# EAGLE board SAS_rev04 (EAGLE 7.5.0)
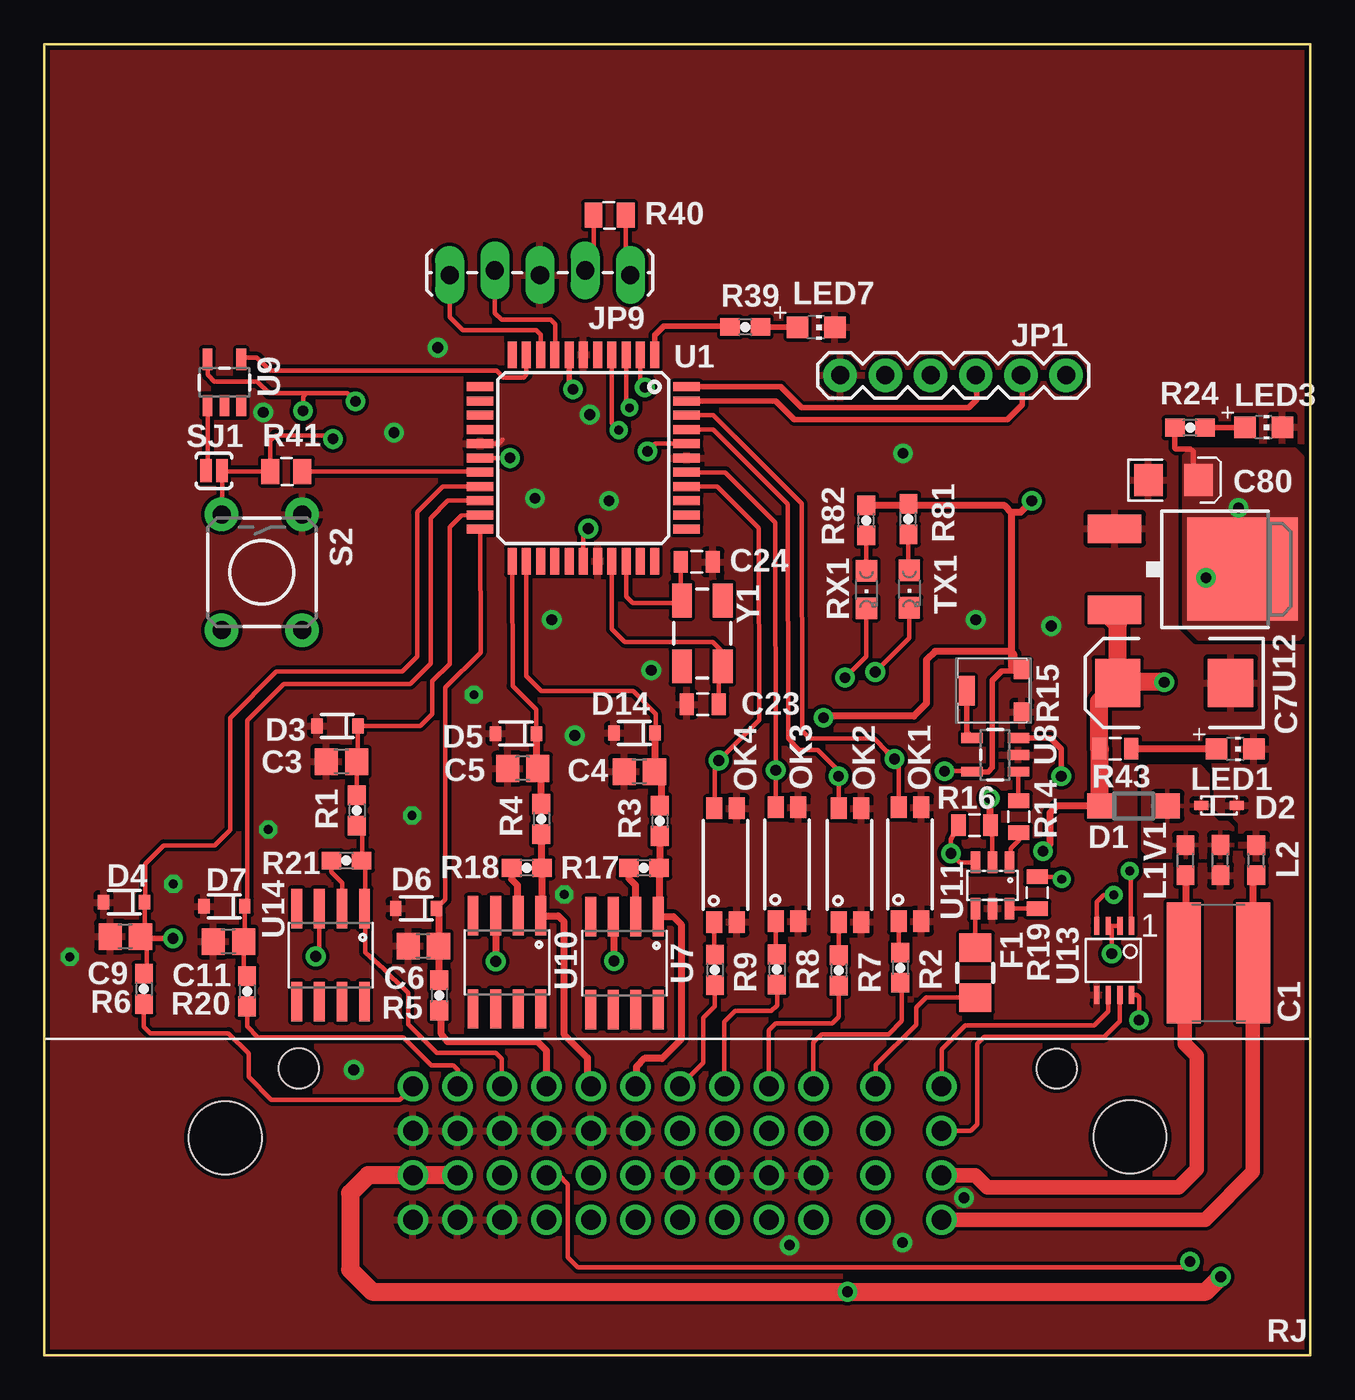
[diagram p0: board, top side]
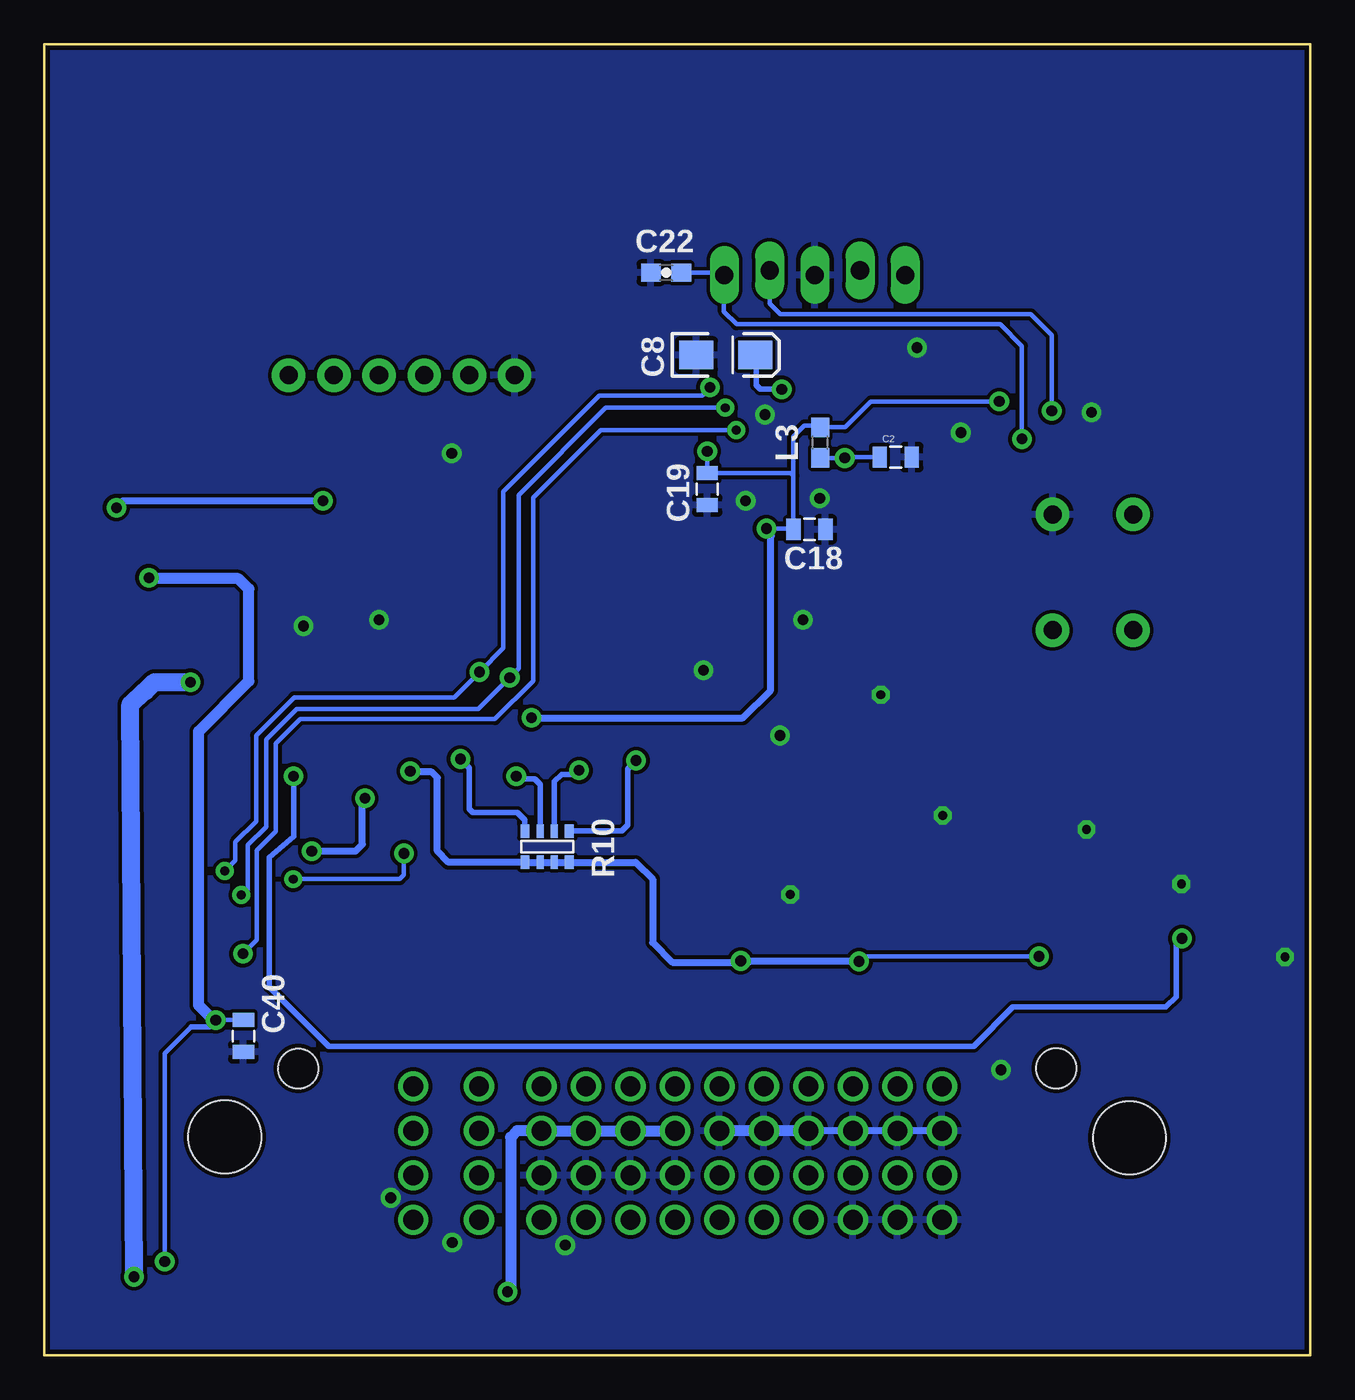
[diagram p1: board, bottom side, seen from below]

Size 71.12 x 73.66 mm. Coordinates in mm from the lower left corner, seen from the top.
Copper layers (1*16): Top 0.035mm / dielectric 1.5mm / Bottom 0.035mm
Design rules "SparkFun *": minimum track width 8mil, minimum drill 19mil, track to track 8mil, track to pad 8mil, pad to pad 8mil, via to via 8mil, smd to smd 8mil, copper to edge 10mil, drill to drill 8mil, minimum pad ring 12mil, minimum via ring 10mil, stop-mask expansion 4mil, vias tented up to drill 25mil, thermal gap 10mil

## Footprints (pad centres in the part's own frame; a part is rotated, then mirrored left to right if it is on the bottom)
C1825 = smd 6.8 x 1.9: 1 0,-1.95; 2 0,1.95
0805 = smd 0.8 x 1.2: 1 -0.9,0; 2 0.9,0
C0805 = smd 1.3 x 1.5: 1 -0.85,0; 2 0.85,0
EIA7343 = smd 2.55 x 2.7: A 3.17,0; C -3.17,0
EIA3216-16V = smd 1.9 x 1.6: A 1.65,0; C -1.65,0
0603 = smd 1.1 x 1: 1 -0.85,0; 2 0.85,0
POLC1206 = smd 1.6 x 1.8: 1 -1.4,0; 2 1.4,0
SOD123 = smd 1.4 x 1.4: A 1.9,0; C -1.9,0
SOD-523F = smd 0.8 x 0.5: A -1,0; C 1,0
SOD-323 = smd 0.63 x 0.83: 1 -1.15,0; 2 1.15,0
1206 = smd 1.6 x 1.8: 1 -1.4,0; 2 1.4,0
36638-M = drill 1.1: 1 20.7,15.1; 2 20.7,12.6; 3 20.7,10.1; 4 20.7,7.6; 5 23.2,15.1; 6 23.2,12.6; 7 23.2,10.1; 8 23.2,7.6; 9 25.7,15.1; 10 25.7,12.6; 11 25.7,10.1; 12 25.7,7.6; 13 28.2,15.1; 14 28.2,12.6; 15 28.2,10.1; 16 28.2,7.6; 17 30.7,15.1; 18 30.7,12.6; 19 30.7,10.1; 20 30.7,7.6; 21 33.2,15.1; 22 33.2,12.6; 23 33.2,10.1; 24 33.2,7.6; 25 35.7,15.1; 26 35.7,12.6; 27 35.7,10.1; 28 35.7,7.6; 29 38.2,15.1; 30 38.2,12.6; 31 38.2,10.1; 32 38.2,7.6; 33 40.7,15.1; 34 40.7,12.6; 35 40.7,10.1; 36 40.7,7.6; 37 43.2,15.1; 38 43.2,12.6; 39 43.2,10.1; 40 43.2,7.6; 41 46.7,15.1; 42 46.7,12.6; 43 46.7,10.1; 44 46.7,7.6; 45 50.4,15.1; 46 50.4,12.6; 47 50.4,10.1; 48 50.4,7.6 | hole 2.25: 56.87,16.1; 14.28,16.12 | hole 4.1: 60.99,12.26; 10.16,12.21
FTDI_BASIC = drill 1.016 pad 1.88: CTS 10.16,0; DTR 0,0; GND 12.7,0; RXI 2.54,0; TXO 5.08,0; VCC 7.62,0
1X05_LOCK_LONGPADS = drill 1.016 long: 1 0,0; 2 2.54,-0.254; 3 5.08,0; 4 7.62,-0.254; 5 10.16,0
CHIP-LED0805 = smd 1.2 x 1.2: A 0,-1.05; C 0,1.05
SOP-4 = smd 1.2 x 0.9: 1 -3.2,0.67; 2 -3.2,-0.6; 3 3.2,-0.6; 4 3.2,0.67
MNR14 = smd 0.5 x 0.75: 1 -1.25,-0.9; 4 1.25,-0.9; 5 1.25,0.85; 8 -1.25,0.85 | smd 0.4 x 0.75: 2 -0.4,-0.9; 3 0.4,-0.9; 6 0.4,0.85; 7 -0.4,0.85
PVG3 = smd 1.1 x 0.9: 1 1.2,-1.5; 3 -1.2,-1.5 | smd 1.65 x 0.9: 2 0,1.6
0805' = smd 1 x 1.4: 1 -0.9,0; 2 0.9,0
CHIPLED_0805 = smd 1.2 x 1.2: A 0,-1.05; C 0,1.05
TACTILE-PTH = drill 1.016 pad 1.88: 1 -3.251,2.261; 2 3.251,2.261; 3 -3.251,-2.261; 4 3.251,-2.261
SJ_2S-NO = smd 0.635 x 1.27: 1 -0.45,0; 2 0.45,0
TQFP-44 = smd 1.5 x 0.5: 1 -5.8,4; 2 -5.8,3.2; 3 -5.8,2.4; 4 -5.8,1.6; 5 -5.8,0.8; 6 -5.8,0; 7 -5.8,-0.8; 8 -5.8,-1.6; 9 -5.8,-2.4; 10 -5.8,-3.2; 11 -5.8,-4; 23 5.8,-4; 24 5.8,-3.2; 25 5.8,-2.4; 26 5.8,-1.6; 27 5.8,-0.8; 28 5.8,0; 29 5.8,0.8; 30 5.8,1.6; 31 5.8,2.4; 32 5.8,3.2; 33 5.8,4 | smd 0.5 x 1.5: 12 -4,-5.8; 13 -3.2,-5.8; 14 -2.4,-5.8; 15 -1.6,-5.8; 16 -0.8,-5.8; 17 0,-5.8; 18 0.8,-5.8; 19 1.6,-5.8; 20 2.4,-5.8; 21 3.2,-5.8; 22 4,-5.8; 34 4,5.8; 35 3.2,5.8; 36 2.4,5.8; 37 1.6,5.8; 38 0.8,5.8; 39 0,5.8; 40 -0.8,5.8; 41 -1.6,5.8; 42 -2.4,5.8; 43 -3.2,5.8; 44 -4,5.8
SO-8 = smd 0.61 x 2.21: 1 -1.905,-2.616; 2 -0.635,-2.616; 3 0.635,-2.616; 4 1.905,-2.616; 5 1.905,2.616; 6 0.635,2.616; 7 -0.635,2.616; 8 -1.905,2.616
SOT23-5 = smd 0.55 x 1.2: 1 -0.95,-1.3; 2 0,-1.3; 3 0.95,-1.3; 4 0.95,1.3; 5 -0.95,1.3
SOT23-5L = smd 0.55 x 1.2: 1 -0.95,-1.3; 2 0,-1.3; 3 0.95,-1.3; 4 0.95,1.3; 5 -0.95,1.3
SOT23-6 = smd 0.55 x 1.2: 1 -0.95,-1.3; 2 0,-1.3; 3 0.95,-1.3; 4 0.95,1.3; 5 0,1.3; 6 -0.95,1.3
V-REG_DPACK = smd 1.6 x 3: 1 -2.28,-4.8; 3 2.28,-4.8 | smd 5.8 x 6.2: 4 0,2.38
MSOP-8 = smd 0.3 x 1: 1 -0.975,-1.95; 2 -0.325,-1.95; 3 0.325,-1.95; 4 0.975,-1.95; 5 0.975,1.925; 6 0.325,1.925; 7 -0.325,1.925; 8 -0.975,1.925
CRYSTAL-SMD-5X3 = smd 1.9 x 1.1: 1 -1.85,-1.15; 2 1.85,-1.15; 3 1.85,1.15; 4 -1.85,1.15

## Placement (x,y rotation side)
C1  CAP_1000PF_2KV  [C1825]  65.96,22.05 270 top
C2  .1uF  [0805]  23.29,50.47 0 bottom
C3  10uF  [C0805]  16.69,33.35 180 top
C4  10uF  [C0805]  33.43,32.79 180 top
C5  10uF  [C0805]  26.87,32.97 180 top
C6  10uF  [C0805]  21.29,22.99 180 top
C7  100uF  [EIA7343]  63.47,37.77 180 top
C8  10uF  [EIA3216-16V]  32.84,56.21 0 bottom
C9  10uF  [C0805]  4.55,23.52 180 top
C11  10uF  [C0805]  10.34,23.24 180 top
C18  0.1uF  [0805]  28.14,46.41 0 bottom
C19  0.1uF  [0805]  33.88,48.67 270 bottom
C22  10n  [0603]  36.2,60.83 180 bottom
C23  12pF  [0805]  36.98,36.58 180 top
C24  12pF  [0805]  36.65,44.58 0 top
C40  .1uF  [0805]  59.94,17.93 270 bottom
C80  10uF  [POLC1206]  63.43,49.18 180 top
D1  1N4001  [SOD123]  61.19,30.86 0 top
D2  MM5Z30  [SOD-523F]  65.99,30.89 180 top
D3  BZX384-B3V3  [SOD-323]  16.46,35.36 180 top
D4  BZX384-B3V3  [SOD-323]  4.47,25.45 180 top
D5  BZX384-B3V3  [SOD-323]  26.49,34.93 180 top
D6  BZX384-B3V3  [SOD-323]  20.88,25.1 180 top
D7  BZX384-B3V3  [SOD-323]  10.11,25.22 180 top
D14  BZX384-B3V3  [SOD-323]  33.15,34.96 180 top
F1  120mA  [1206]  52.3,21.49 270 top
J1  36638NEW  [36638-M]  0,0 0 top
JP1  FTDI_BASICPTH  [FTDI_BASIC]  57.4,55.07 180 top
JP9  ICSP  [1X05_LOCK_LONGPADS]  32.92,60.71 180 top
L1  FB  [0603]  64.11,27.82 90 top
L2  FB  [0603]  68.09,27.81 90 top
L3  FB  [0603]  27.53,51.28 90 bottom
LED1  [CHIP-LED0805]  66.9,34.06 270 top
LED3  [CHIP-LED0805]  68.5,52.15 270 top
LED7  [CHIP-LED0805]  43.36,57.76 270 top
OK1  TCMT1103  [SOP-4]  48.67,27.58 90 top
OK2  TCMT1103  [SOP-4]  45.29,27.53 90 top
OK3  TCMT1103  [SOP-4]  41.76,27.58 90 top
OK4  TCMT1103  [SOP-4]  38.3,27.53 90 top
R1  1k  [0603]  17.55,30.61 270 top
R2  220  [0603]  48.08,21.77 270 top
R3  1k  [0603]  34.57,30.02 270 top
R4  1k  [0603]  27.91,30.12 270 top
R5  1k  [0603]  22.17,20.22 270 top
R6  1k  [0603]  5.59,20.57 270 top
R7  220  [0603]  44.63,21.62 270 top
R8  220  [0603]  41.15,21.67 270 top
R9  220  [0603]  37.67,21.64 270 top
R10  10K  [MNR14]  42.88,28.55 180 bottom
R14  1K  [0805]  54.74,30.25 90 top
R15  10k  [PVG3]  53.42,37.34 90 top
R16  10K  [0805]  52.25,29.77 180 top
R17  68  [0603]  33.68,27.38 180 top
R18  68  [0603]  27.1,27.38 180 top
R19  10K  [0805]  55.78,25.98 270 top
R20  1k  [0603]  11.38,20.45 270 top
R21  68  [0603]  16.97,27.79 180 top
R24  499  [0603]  64.36,52.12 180 top
R39  499  [0603]  39.37,57.79 180 top
R40  10k  [0805']  31.75,64.06 180 top
R41  499  [0805']  13.59,49.66 0 top
R43  1.2k  [0805]  60.16,34.08 180 top
R81  1K  [0603]  48.54,46.99 90 top
R82  1k  [0603]  46.18,46.91 90 top
RX1  [CHIPLED_0805]  46.18,43.03 180 top
S2  ts  [TACTILE-PTH]  12.22,43.99 270 top
SJ1  SJ-NO  [SJ_2S-NO]  9.53,49.71 0 top
TX1  [CHIPLED_0805]  48.59,43.05 180 top
U1  DSPIC33FJ128GP804  [TQFP-44]  30.28,50.42 270 top
U7  LM334SM/NOPB-ND  [SO-8]  32.59,22.02 180 top
U8  OPA344  [SOT23-5]  53.42,33.73 90 top
U9  MAX823  [SOT23-5L]  10.11,54.66 0 top
U10  LM334SM/NOPB-ND  [SO-8]  25.98,22.07 180 top
U11  DMG6602SVTQ  [SOT23-6]  53.26,26.39 180 top
U12  NCP1117DT33T5G  [V-REG_DPACK]  64.92,44.17 270 top
U13  SN75HVD08DRMSOP  [MSOP-8]  60.1,22.17 180 top
U14  LM334SM/NOPB-ND  [SO-8]  16.08,22.48 180 top
U$1  LOGO16-L  [2016-LOGO-L]  1.12,63.4 0 top
V1  13Vdc  [0603]  66.07,27.82 90 top
Y1  12Mhz  [CRYSTAL-SMD-5X3]  36.96,40.56 90 top

## Library data of the parts
C1 = FSAE Electric; PARTNO: 1825GC102KAT1A
C2 C40 = FSAE Electric; PARTNO: CC0805ZRY5V9BB104
C3-C6 C9 C11 LED1 LED3 LED7 RX1 TX1 = adafruit
C7 C18 C19 C23 C24 = SparkFun-Capacitors
C8 = FSAE Electric; PARTNO: T491A106M016AT
C22 = FSAE Electric; PARTNO: CL10F103ZB8NNNC
C80 = RJ's_parts
D1 = diode
D2 L1 L2 V1 = EmEndev
D3-D7 D14 = SparkFun
F1 = FSAE Electric; PARTNO: 0ZCJ0012FF2E
J1 = FSAE Electric
JP1 JP9 = SparkFun-Connectors
L3 SJ1 = SparkFun-Passives
OK1-OK4 = FSAE Electric; PARTNO: TCMT1103
R1 R3-R6 R20 R81 R82 = FSAE Electric; PARTNO: RC0603JR-071KL
R2 R7-R9 = FSAE Electric; PARTNO: RC0603FR-07220RL
R10 = FSAE Electric; PARTNO: MNR14ERAPJ103
R14 = FSAE Electric; PARTNO: RC0805FR-071KL
R15 = FSAE Electric; PARTNO: PVG3A103C01R00
R16 R19 = FSAE Electric; PARTNO: RC0805FR-0710KL
R17 R18 R21 = FSAE Electric; PARTNO: CRCW060368R0FKEA
R24 R39 = FSAE Electric; PARTNO: RC0603FR-07499RL
R40 = FSAE Eletric; PARTNO: RC0805FR-0710KL
R41 = FSAE Eletric; PARTNO: RC0805FR-07499RL
R43 = FSAE Electric; PARTNO: RC0805FR-071K2L
S2 = SparkFun-Electromechanical
U1 = FSAE Electric; PARTNO: DSPIC33FJ128GP804-I/PT
U7 U10 U14 = FSAE Electric; PARTNO: LM334SM/NOPB-ND
U8 = FSAE Electric; PARTNO: OPA344NA/3K
U9 = NASA_LIB
U11 = FSAE Electric; PARTNO: DMG6602SVTQ-7
U12 = SparkFun-PowerIC
U13 = FSAE Electric; PARTNO: ISL83072EIUZA-T
U$1 = Pic
Y1 = SparkFun-FreqCtrl

## Nets
+: C1.1 J1.47 L1.1
+3V3: C18.1 C19.1 C40.1 C80.1 J1.15 JP9.2 L3.2 R10.5 R10.6 R10.7 R10.8 R15.1 R24.2 R40.2 R81.2 R82.2 U1.28 U1.40 U7.3 U8.5 U9.5 U10.3 U12.4 U13.8 U14.3
+9V: C7.A D1.C J1.3 J1.7 J1.26 J1.30 J1.34 J1.38 R16.1 R43.2 U11.2 U12.3
-: C1.2 J1.48 L2.1
AN0: C9.1 D4.1 R6.1 U1.19 U8.3
AN1: C11.1 D7.1 R20.1 U1.20
AN2: C3.1 D3.1 R1.1 U1.21
AN3: C6.1 D6.1 R5.1 U1.22
AN4: C5.1 D5.1 R4.1 U1.23
AN5: C4.1 D14.1 R3.1 U1.24
AN6: U1.26
AN7: U1.25
GHT: D1.A D2.C L1.2 V1.2
GND: C2.2 C3.2 C4.2 C5.2 C6.2 C7.C C8.C C9.2 C11.2 C18.2 C19.2 C22.2 C23.2 C24.2 C40.2 C80.2 D2.A D3.2 D4.2 D5.2 D6.2 D7.2 D14.2 J1.2 J1.4 J1.6 J1.8 J1.10 J1.12 J1.14 J1.18 J1.22 J1.27 J1.31 J1.35 J1.39 JP1.GND JP9.3 L2.2 LED1.C LED3.C LED7.C OK1.2 OK1.3 OK2.2 OK2.3 OK3.2 OK3.3 OK4.2 OK4.3 R15.3 S2.1 U1.6 U1.16 U1.29 U1.39 U8.2 U11.5 U12.1 U13.5 V1.1
GNDIO: U9.2
N$1: C22.1 JP9.1 R40.1 R41.1 S2.3 SJ1.2
N$2: C2.1 L3.1 U1.17
N$3: J1.21 R3.2 R17.1 U7.1
N$4: C8.A U1.7
N$5: R39.2 U1.1
N$6: LED1.A R43.1
N$7: R17.2 U7.2
N$8: R41.2 U1.18
N$9: R15.2 U8.4
N$10: SJ1.1 U9.1
N$11: J1.37 R2.2
N$12: JP9.4 U1.8
N$15: JP9.5 U1.9
N$16: J1.33 R7.2
N$17: J1.29 R8.2
N$18: J1.25 R9.2
N$19: OK1.1 R2.1
N$20: OK2.1 R7.1
N$21: OK3.1 R8.1
N$22: OK4.1 R9.1
N$24: R18.2 U10.2
N$25: LED3.A R24.1
N$28: J1.17 R4.2 R18.1 U10.1
N$29: J1.9 R1.2 R21.1 U14.1
N$31: J1.13 R5.2
N$32: J1.5 R20.2
N$34: R14.2 U8.1
N$37: LED7.A R39.1
N$39: C24.1 U1.31 Y1.3
N$40: C23.1 U1.30 Y1.1
N$42: R19.2 U11.6
N$44: R16.2 R19.1 U11.3
N$45: F1.1 U11.4
N$46: J1.1 R6.2
N$48: R21.2 U14.2
N$86: R81.1 TX1.A
N$87: R82.1 RX1.A
OUT-B_P: F1.2 J1.41
RS485-1-A: J1.45 U13.6
RS485-1-B: J1.46 U13.7
RXD1: TX1.C U1.2 U13.1
RXD2: JP1.RXI U1.43
TXD1: RX1.C U1.3 U13.4
TXD2: JP1.TXO U1.44
U4: U1.5
U13: U1.4 U13.2 U13.3
WDI: U1.10 U9.4
WS1: OK1.4 R10.4 U1.42
WS2: OK2.4 R10.3 U1.41
WS3: OK3.4 R10.2 U1.38
WS4: OK4.4 R10.1 U1.37
YO: R14.1 U11.1

## Tracks (layer width: path | path; a pad name or v marks a point on that pad's centre or on a via)
+
  Top 0.406: L1.1 64.11,22.15 C1.1
  Top 0.813: J1.47 52.28,10.1 52.96,9.42 63.73,9.42 64.74,10.44 64.74,16.81 64.06,17.5 64.06,22 C1.1
+3V3  (via drill 0.6)
  Top 0.254: U13.8 61.36,20.25 61.52,20.09 61.52,18.85 v61.49,18.82 | v50.57,32.82 52.08,32.82 U8.5 | J1.15 28.91,10.1 29.41,9.6 29.41,5.49 29.97,4.93 64.03,4.93 v64.36,5.26 | U14.3 15.44,22.61 v15.24,22.4 | R40.2 30.85,61.43 JP9.2 | U9.5 9.16,55.1 9.55,54.71 11.96,54.71 12.62,54.05 14.71,54.05 | 14.71,54.05 17.02,54.05 v17.48,53.59 | R81.2 46.25,47.84 R82.2 53.94,47.76 54.33,47.37 54.33,47.35 54.33,39.12 R15.1 | U1.28 30.28,46.18 v30.56,46.46 | U1.40 34.3,51.22 v33.88,50.8 | v67.08,47.62 67.23,47.62 67.34,47.52 67.36,47.52 | v14.53,53.06 14.53,53.87 14.71,54.05
  Top 0.305: U8.5 53.02,32.78 53.26,33.02 53.26,37.92 53.8,38.46 54.83,38.46 R15.1 | R24.2 63.51,51.01 63.6,50.93 64.39,50.93 64.54,50.77 64.54,49.61 64.77,49.38 64.77,49.33
  Top 0.406: U10.3 v25.35,22.12 | v32,22.15 32,24.59 U7.3 | R82.2 53.91,47.76 54.33,47.35 54.33,38.71 54.48,38.56 54.48,39.37 54.31,39.55 50.04,39.55 49.56,39.07 49.56,36.63 48.84,35.92 43.87,35.92 v43.76,35.81 | 54.33,47.37 54.84,47.37 v55.47,48.01
  Top 0.61: v65.25,43.69 65.25,44.07 65.07,44.25
  Bottom 0.254: 50.8,33.05 v50.57,32.82 | C40.1 61.48,18.83 v61.49,18.82 | v64.36,5.26 64.36,16.94 62.86,18.44 | v15.24,22.4 25.07,22.4 v25.35,22.12 | v17.48,53.59 24.69,53.59 26.14,52.15 27.52,52.15 L3.2 27.65,52.25 28.42,52.25 29.04,51.63 29.04,49.43 | v30.56,46.46 29.09,46.46 C18.1 29.04,49.43 | v33.88,50.8 C19.1 29.18,49.57 29.04,49.43 | JP9.2 30.38,59.11 29.77,58.5 15.7,58.5 14.53,57.33 v14.53,53.06
  Bottom 0.305: 62.86,18.44 61.87,18.44 v61.49,18.82
  Bottom 0.406: v25.35,22.12 31.5,22.12 | 31.5,22.12 31.98,22.12 v32,22.15 | 31.5,22.12 31.55,22.07 35.84,22.07 36.96,23.19 36.96,26.75 37.91,27.7 R10.8 R10.7 R10.6 R10.5 48.43,27.7 49.05,28.32 49.05,32.46 49.35,32.77 50.52,32.77 v50.57,32.82 | v43.76,35.81 31.88,35.81 30.33,37.36 30.33,46 30.28,46.05 30.28,46.18 v30.56,46.46 | v55.47,48.01 66.7,48.01 v67.08,47.62
  Bottom 0.61: v61.49,18.82 61.62,18.82 62.46,19.66 62.46,35.05 59.64,37.87 59.64,43.05 60.22,43.64 65.2,43.64 v65.25,43.69
  pour Top (no thermals): 64.06,50.52 64.06,41.12 64.87,40.31 70.46,40.31 70.64,40.49 70.64,50.44 70.23,50.85 64.39,50.85
+9V  (via drill 0.6)
  Top 0.254: U11.2 53.26,29.32 R16.1
  Top 0.406: D1.C 56.87,30.86 56.49,30.48 56.49,28.7 v56.11,28.32 | v53.11,31.29 53.11,29.81 R16.1
  Top 0.61: J1.7 J1.3
  Top 1.016: J1.7 18.18,10.1 17.17,9.09 17.17,4.8 18.41,3.56 v45.11,3.56 65.25,3.56 v66.09,4.39 | D1.C 59.29,34.05 R43.2 59.26,36.72 C7.A | C7.A 60.3,41.07 59.61,41.76 59.99,41.76 U12.3 | v62.92,37.82 60.36,37.82 C7.A
  Bottom 0.406: v56.11,28.32 53.64,28.32 53.26,28.7 53.26,31.14 v53.11,31.29
  Bottom 0.61: J1.26 J1.30 J1.34 J1.38 44.58,12.6 44.93,12.24 44.93,3.73 v45.11,3.56
  Bottom 1.016: v66.09,4.39 66.29,36.58 65.51,37.31 65.46,37.31 64.95,37.82 v62.92,37.82
-
  Top 0.406: C1.2 67.91,26.96 L2.1
  Top 0.813: J1.48 65.21,7.6 67.89,10.29 67.89,22.03 C1.2
AN0  (via drill 0.6)
  Top 0.254: R6.1 5.74,21.58 5.74,23.27 5.49,23.52 C9.1 5.62,23.74 D4.1 5.66,25.49 5.66,27.61 6.71,28.65 9.58,28.65 10.44,29.51 10.44,35.81 13.03,38.4 20.09,38.4 20.95,39.27 20.93,47.37 22.38,48.82 U1.19
  Top 0.305: U8.3 56.5,34.68 57.12,34.06 v57.12,32.54 | v7.21,23.42 5.5,23.42 C9.1
  Bottom 0.305: v57.12,32.54 57.12,29.13 58.5,27.97 58.5,20.7 55.14,17.35 18.92,17.35 16.71,19.56 8.13,19.56 7.54,20.14 7.54,23.09 v7.21,23.42
AN1
  Top 0.254: R20.1 11.19,21.49 C11.1 11.26,23.31 D7.1 11.38,25.34 11.38,35.66 13.44,37.72 20.55,37.72 21.69,38.86 21.69,47.04 22.67,48.02 U1.20
AN2
  Top 0.254: R1.1 17.55,33.21 C3.1 17.61,33.29 D3.1 21.11,35.36 21.79,36.04 21.79,37.87 22.76,38.84 22.76,46.53 23.42,47.19 U1.21
AN3
  Top 0.254: U1.22 24.5,39.49 22.53,37.52 22.53,25.6 D6.1
  Top 0.406: R5.1 22.17,22.95 C6.1 22.15,23 22.15,24.71 22.03,24.83 D6.1
AN4
  Top 0.254: U1.23 26.3,37.6 27.64,36.27 D5.1
  Top 0.406: R4.1 27.91,32.78 C5.1 27.64,33.05 D5.1
AN5
  Top 0.254: U1.24 27.08,38.15 27.91,37.31 33.07,37.31 34.34,36.04 34.34,35.01 D14.1
  Top 0.406: R3.1 34.65,30.95 34.65,32.61 34.47,32.79 C4.1 34.3,32.81 D14.1
GHT
  pour Top: 62,33.07 64.9,33.07 65.35,32.61 65.35,30.45 65.91,29.9 66.45,29.9 66.73,29.62 66.73,28.04 66.67,27.99 62.18,27.99 61.75,28.42 61.75,32.82
GND  (via drill 0.5, 0.6)
  Top 0.254: U1.16 25.51,51.22 25.76,51.46
  Bottom 0.406: J1.2 J1.6 J1.10 J1.14
  Bottom 0.61: J1.14 J1.18 J1.22
  other vias: 7.24,26.47 1.42,22.38 17.37,16.03 20.65,30.33 29.21,25.88 24.13,37.11 12.57,29.54 51.66,8.84 48.21,6.32 41.86,6.17 12.29,52.98 19.63,51.84 31.72,48.01 30.63,52.86 27.56,48.16 22.1,56.62 48.23,50.67 34.09,38.48 28.5,41.33 29.79,34.82 52.32,41.33 56.57,40.97
  pour Top (rank 6): -1.65,77.01 75.31,77.01 75.31,-3.23 -1.65,-3.23
  pour Bottom: -2.21,76.3 76.66,76.3 76.66,-1.57 -2.21,-1.57
N$1  (via drill 0.6)
  Top 0.254: S2.3 9.97,47.26 SJ1.2 10.03,49.66 R41.1 12.69,51.4 12.98,51.69 16,51.69 v16.21,51.49 | R40.1 32.65,60.97 JP9.1
  Bottom 0.254: C22.1 33.05,60.83 JP9.1 32.94,60.68 32.94,58.65 32.23,57.94 17.42,57.94 16.21,56.72 v16.21,51.49
N$2  (via drill 0.6)
  Top 0.254: U1.17 v26.16,50.42
  Bottom 0.254: L3.1 27.52,50.42 v26.16,50.42 26.11,50.47 C2.1
N$3
  Top 0.406: J1.21 33.25,15.15 33.25,16.21 33.71,16.66 34.7,16.66 35.76,17.73 35.76,24.21 35.33,24.64 U7.1 34.53,24.68 R17.1 34.57,27.42 R3.2
N$4  (via drill 0.6)
  Top 0.305: U1.7 29.48,54.5 v29.69,54.28
  Bottom 0.305: v29.69,54.28 30.91,54.28 31.14,54.51 31.14,56.16 C8.A
N$5
  Top 0.305: U1.1 34.28,57.31 34.8,57.84 38.47,57.84 R39.2
N$6
  Top 0.406: R43.1 65.83,34.08 LED1.A
N$7
  Top 0.406: R17.2 32.83,26.78 33.2,26.42 33.2,24.66 U7.2
N$8
  Top 0.254: R41.2 24.44,49.66 U1.18
N$9
  Top 0.305: R15.2 51.82,34.98 U8.4
N$10
  Top 0.254: U9.1 9.16,49.79 SJ1.1
N$11
  Top 0.254: J1.37 43.2,17.57 43.66,18.03 47.42,18.03 48.16,18.77 48.16,20.84 R2.2
N$12
  Top 0.254: JP9.4 25.3,58.57 25.68,58.19 28.45,58.19 28.7,57.94 28.7,56.24 U1.8
N$15
  Top 0.254: U1.9 27.88,57.37 27.64,57.61 23.49,57.61 22.76,58.34 JP9.5
N$16
  Top 0.254: J1.33 40.7,18.25 41.1,18.64 44.27,18.64 44.63,19 R7.2
N$17
  Top 0.254: J1.29 38.2,18.72 38.81,19.33 40.84,19.33 41.17,19.66 41.17,20.79 R8.2
N$18
  Top 0.254: R9.2 37.67,19.61 37.01,18.95 37.01,16.41 J1.25
N$19
  Top 0.254: OK1.1 48,22.7 R2.1
N$20
  Top 0.254: OK2.1 44.62,22.23 44.86,22 44.86,22.24 R7.1
N$21
  Top 0.254: OK3.1 41.09,22.58 R8.1
N$22
  Top 0.254: OK4.1 37.63,22.53 R9.1
N$24
  Top 0.406: R18.2 26.25,26.73 26.57,26.42 26.57,24.74 U10.2
N$25
  Top 0.305: R24.1 67.43,52.12 LED3.A
N$28
  Top 0.406: J1.17 30.51,15.29 30.51,16.71 29.18,18.03 29.18,24.36 28.85,24.69 U10.1 27.91,24.71 27.91,25.2 27.95,25.23 R18.1 27.91,27.42 R4.2
N$29
  Top 0.254: 18.03,25.22 18.03,27.56 R21.1 17.86,27.83 17.86,29.62 17.72,29.76 R1.2 | 18.03,25.22 18.03,25.15 U14.1 18.03,25.22 | J1.9 25.7,16.64 25.35,16.99 22.05,16.99 20.45,18.59 20.45,20.35 20.19,20.6 19.48,21.26 19.02,21.72 18.54,22.15 18.01,22.63 18.03,25.22
N$31
  Top 0.406: R5.2 22.24,19.37 22.28,19.05 22.28,18.08 22.63,17.63 27.69,17.63 28.19,17.12 J1.13
N$32
  Top 0.254: R20.2 11.38,18.47 11.99,17.86 20.17,17.86 21.74,16.28 22.96,16.28 23.24,16 23.24,15.14 J1.5
N$34
  Top 0.254: U8.1 54.72,31.17 R14.2
N$37
  Top 0.305: R39.1 42.28,57.78 LED7.A
N$39
  Top 0.254: U1.31 32.68,42.63 33.05,42.27 35.66,42.27 Y1.3 35.75,42.47 C24.1
N$40
  Top 0.254: U1.30 31.88,40.79 32.59,40.08 37.54,40.08 38,39.62 38,38.82 Y1.1 37.88,38.49 C23.1
N$42
  Top 0.254: U11.6 R19.2
N$44  (via drill 0.5, 0.6)
  Top 0.254: R19.1 57.09,26.88 v57.15,26.75 | R16.2 50.93,28.97 v50.93,28.19 51.43,27.69 U11.3
  Bottom 0.254: v57.15,26.75 51.16,26.75 50.93,26.97 v50.93,28.19
N$45
  Top 0.254: F1.1 52.3,25.08 U11.4
N$46
  Top 0.254: R6.2 5.59,18.44 5.94,18.08 10.34,18.08 11.48,16.94 11.48,15.62 12.75,14.35 19.95,14.35 J1.1
N$48
  Top 0.254: R21.2 16.12,27.16 16.74,26.54 16.74,25.12 U14.2
N$86
  Top 0.254: R81.1 48.54,44.15 TX1.A
N$87
  Top 0.254: R82.1 RX1.A
OUT-B_P
  Top 0.254: J1.41 46.7,16.3 48.97,18.57 48.97,19.53 49.53,20.09 F1.2
RS485-1-A
  Top 0.254: J1.45 50.4,17.18 51.74,18.52 58.98,18.52 59.77,19.3 U13.6
RS485-1-B
  Top 0.254: J1.46 52.05,12.6 52.4,12.95 52.4,17.48 52.81,17.88 59.54,17.88 60.4,18.75 60.4,20.23 U13.7
RXD1  (via drill 0.5, 0.6)
  Top 0.254: U1.2 33.48,54.64 v33.73,54.38 | TX1.C 48.59,40.31 v46.67,38.39 | v60.99,27.2 61.04,27.15 61.04,24.16 U13.1
  Bottom 0.254: v33.73,54.38 33.73,54.36 34.16,53.92 39.95,53.92 45.34,48.54 45.34,39.73 v46.67,38.39 48.11,36.96 57.1,36.96 59.23,34.82 59.23,30 60.4,28.83 60.4,27.79 v60.99,27.2
RXD2
  Top 0.305: U1.43 41.1,53.62 42.14,52.58 54.1,52.58 54.94,53.42 54.94,54.99 JP1.RXI
TXD1  (via drill 0.5, 0.6)
  Top 0.254: U1.3 32.68,53.43 v32.87,53.24 | RX1.C 46.18,39.27 v44.98,38.07 | v60.07,25.86 59.51,25.86 59.13,25.48 U13.4
  Bottom 0.254: v32.87,53.24 39.57,53.24 44.48,48.34 44.48,38.58 v44.98,38.07 46.74,36.32 56.95,36.32 58.67,34.59 58.67,29.69 59.69,28.68 59.69,26.14 v60.07,25.86
TXD2
  Top 0.305: U1.44 41.36,54.42 42.54,53.24 51.92,53.24 52.37,53.7 52.37,55.02 JP1.TXO
U13  (via drill 0.5, 0.6)
  Top 0.254: U13.2 U13.3 59.97,23.93 v59.97,22.56 | U1.4 31.88,52.37 v32.26,51.99
  Bottom 0.254: v32.26,51.99 39.85,51.99 43.66,48.18 43.66,37.9 45.82,35.74 56.74,35.74 58.12,34.37 58.12,29.44 59.18,28.37 59.18,23.34 v59.97,22.56
WDI
  Top 0.254: U1.10 27.08,55.09 26.92,54.94 25.78,54.94 25.4,55.32 12.67,55.32 11.94,56.06 11.16,56.06 U9.4
WS1  (via drill 0.6)
  Top 0.254: OK1.4 48,33.26 v47.75,33.5 | 47.36,33.9 46.61,34.65 43,34.65 42.57,35.08 42.54,47.85 37.57,52.83 36.09,52.83 U1.42
  Top 0.305: v47.75,33.5 47.36,33.9
  Bottom 0.305: R10.4 44.13,30.08 44.55,30.51 47.07,30.51 47.24,30.68 47.24,32.99 v47.75,33.5
WS2  (via drill 0.6)
  Top 0.254: OK2.4 v44.62,32.54 | 44.62,32.74 44.62,32.83 43.43,34.01 42.42,34.01 41.78,34.65 41.76,47.83 37.57,52.02 U1.41
  Top 0.305: v44.62,32.54 44.62,32.74
  Bottom 0.305: R10.3 43.28,32.07 43.59,32.38 44.47,32.38 v44.62,32.54
WS3  (via drill 0.6)
  Top 0.254: OK3.4 41.08,32.61 v41.08,32.87 41.06,46.8 38.25,49.61 36.09,49.61 U1.38
  Top 0.305: v41.08,32.87 41.08,32.61 | 41.08,32.61
  Bottom 0.305: R10.2 42.48,32.23 42.06,32.64 41.31,32.64 v41.08,32.87
WS4  (via drill 0.6)
  Top 0.254: U1.37 37.79,48.82 40.13,46.48 40.16,35.69 38.05,33.58 | v37.88,33.41 37.67,33.2 37.67,30.77 OK4.4
  Top 0.305: v37.88,33.41 38.05,33.58
  Bottom 0.305: R10.1 38.7,29.45 38.35,29.79 38.35,32.94 v37.88,33.41
YO
  Top 0.254: R14.1 54.74,28.93 54.28,28.47 54.28,27.76 U11.1

## Text on the board
tPlace: D2 | RJ